# Altium PCB Amplifier2.PcbDoc
Units mm, origin at the board's own origin, x right, y up, seen from the top; angles counter-clockwise.
Board outline 80.64 x 88.01 mm, 2 copper layers (Top Layer, Bottom Layer); 44 components, 30 nets, 117 pads, 4 vias.
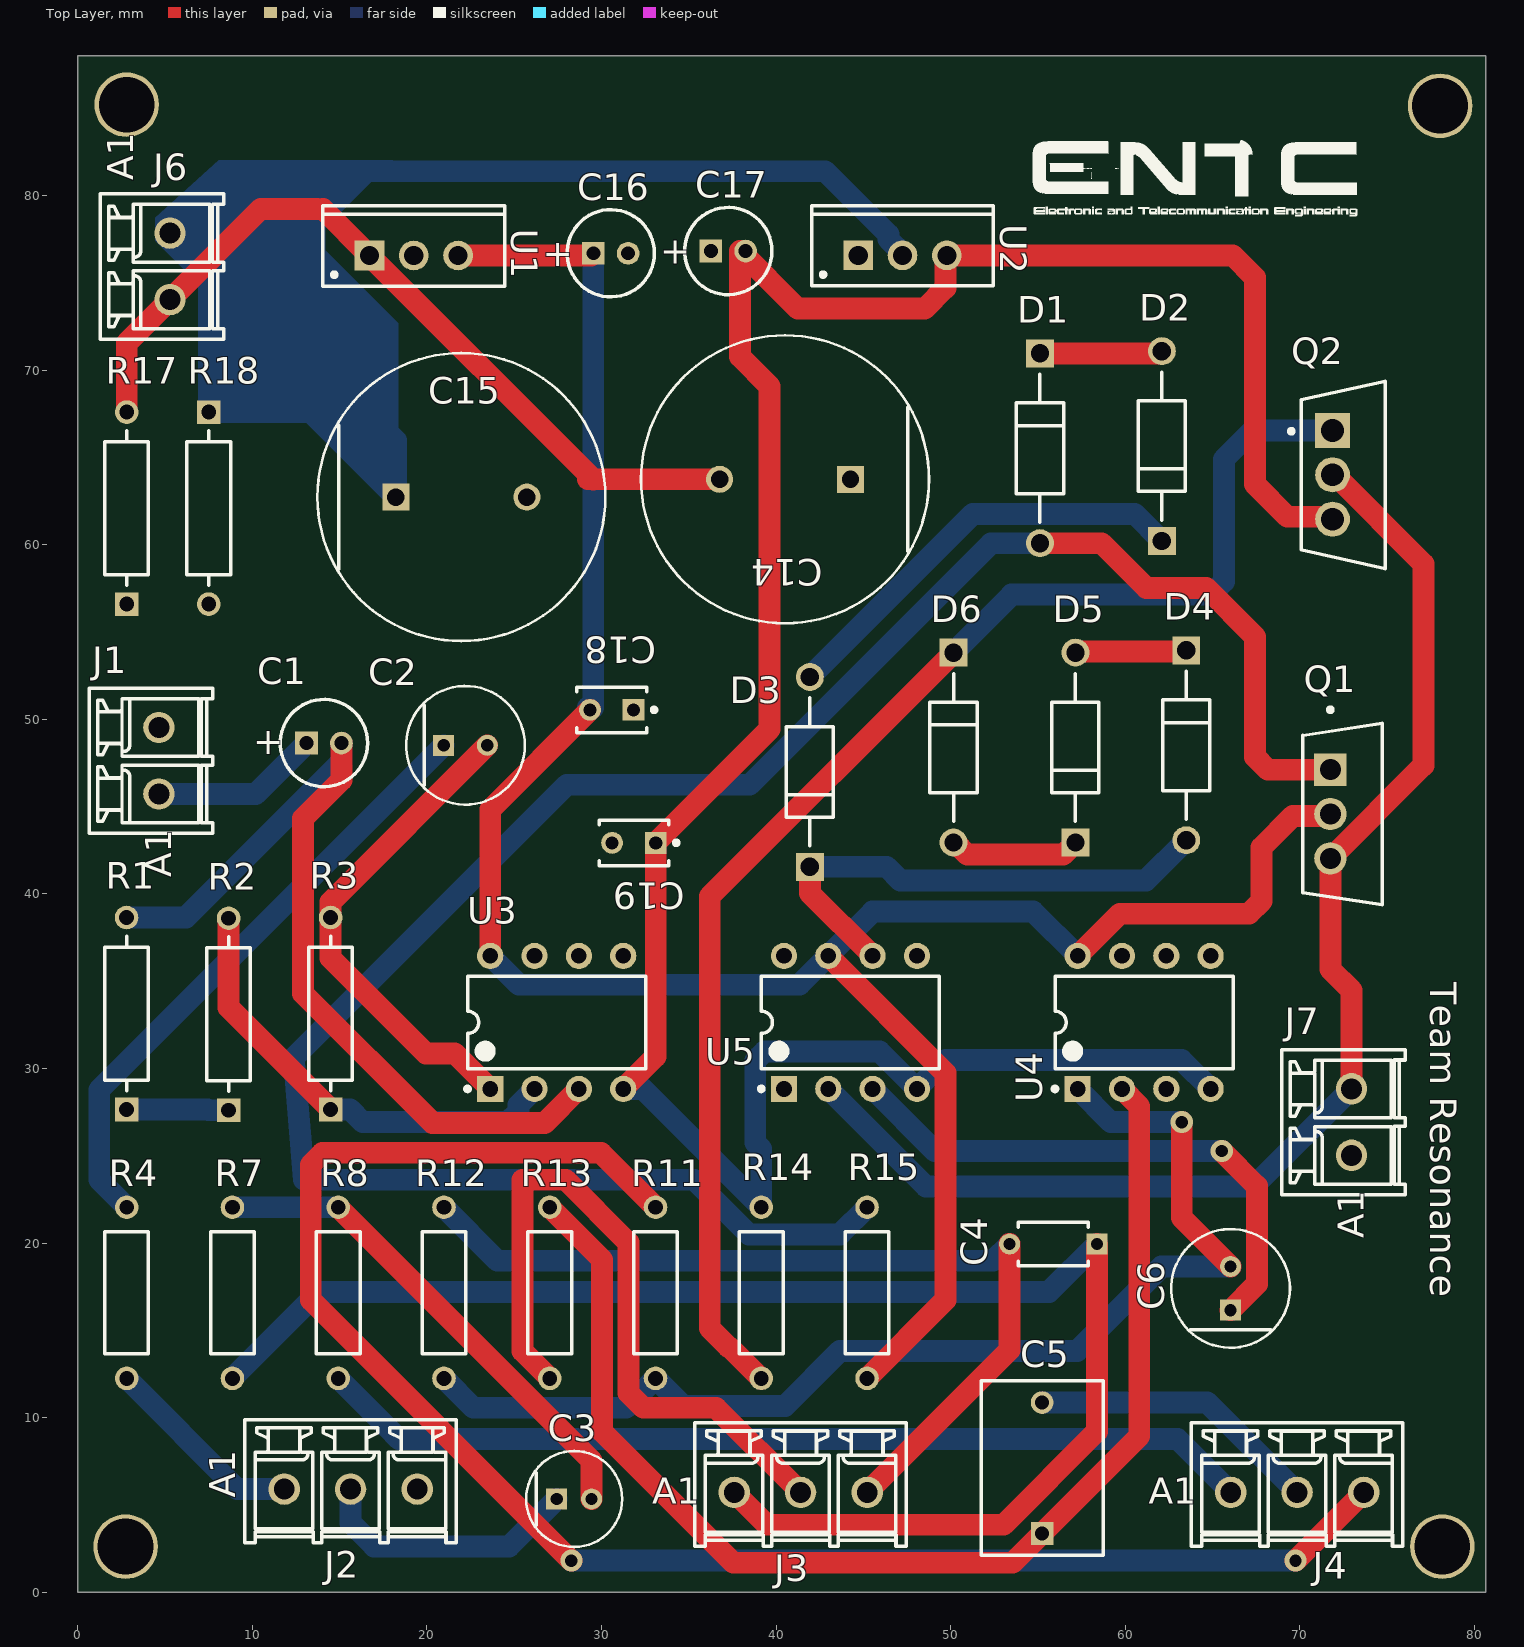
[diagram p0: Top Layer view]
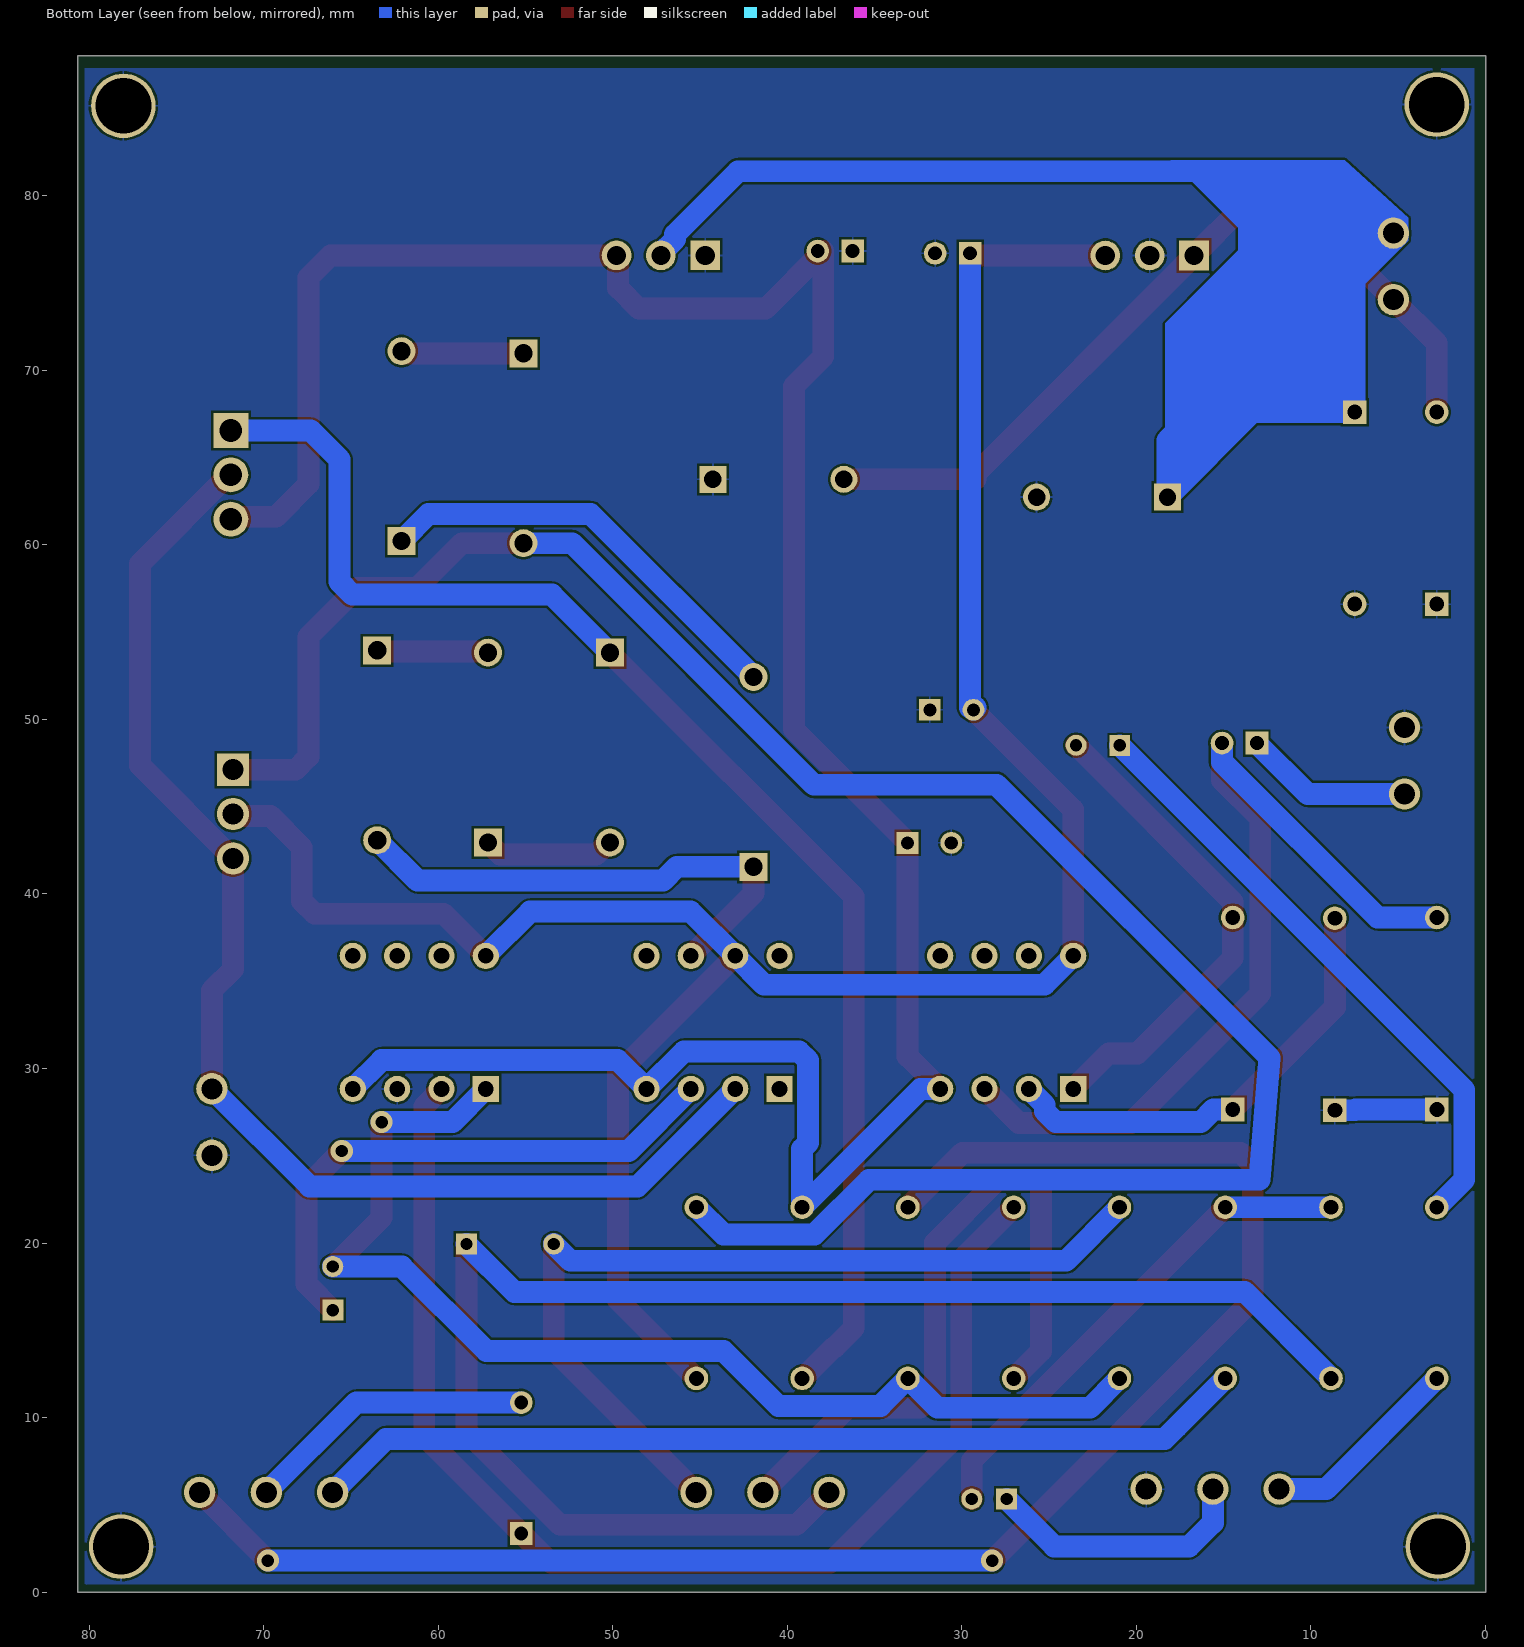
[diagram p1: Bottom Layer view, seen from below]
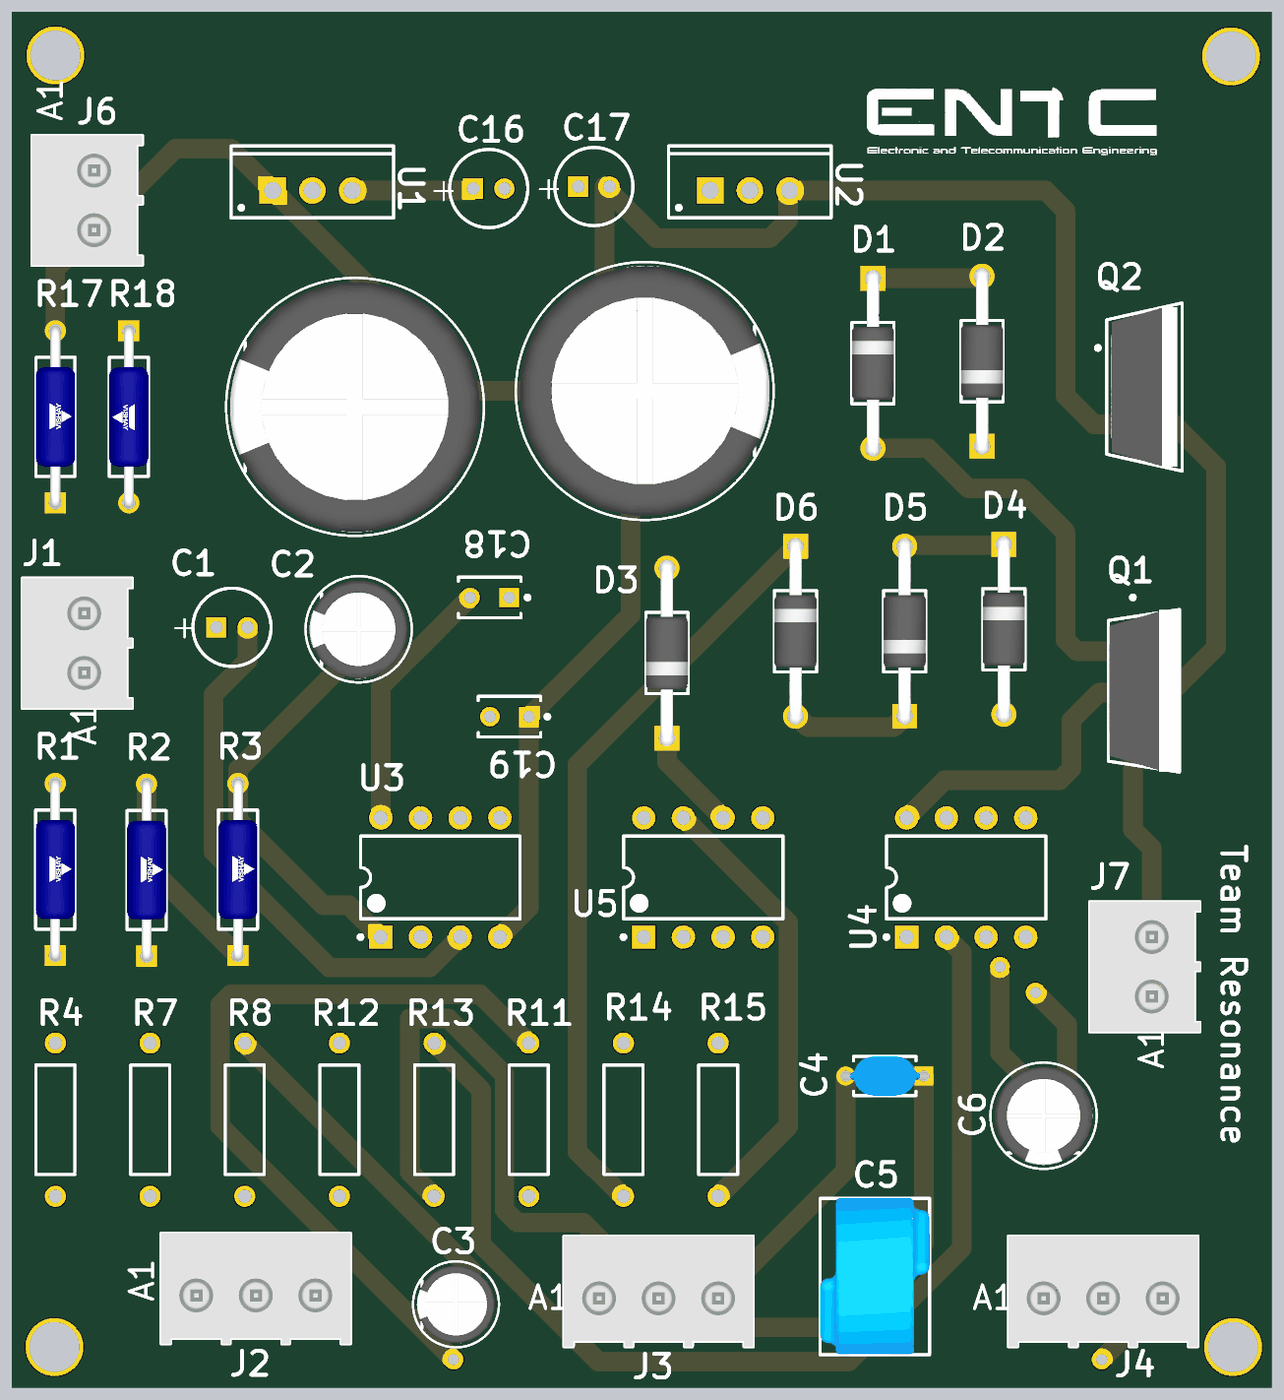
[diagram p2: 3D render of the assembled board from above, using the file's embedded part models]

## Layer stack, top to bottom
Top Solder: solder mask 0.0102, Solder Resist, Dk 3.5
Top Layer: signal copper 0.0356
Dielectric 1: dielectric 0.32, FR-4, Dk 4.8
Bottom Layer: signal copper 0.0356
Bottom Solder: solder mask 0.0102, Solder Resist, Dk 3.5

## Board outline
0,0 80.645,0 80.645,88.011 0,88.011

## Design rules (kind name [scope] priority, off if disabled: settings)
BoardOutlineClearance [All] p1: gap=0.2 ignorepadtopadclearanceinfootprint=FALSE
Clearance [All] p1: gap=0.127 ignorepadtopadclearanceinfootprint=FALSE except(0.25: Arc-Hole Track-Hole SMDPad-Hole THPad-Hole Via-Hole Fill-Hole Poly-Hole Region-Hole Text-Hole)
ComponentClearance [All] p1: gap=0.127 collisioncheckmode=3 verticalgap=0.127 showdistances=TRUE
DiffPairsRouting [All] p1: maxlimit=0.254 minlimit=0.127 mostfreqgap=0.127 toplayer_minwidth=0.127 toplayer_maxwidth=25.4 toplayer_prefwidth=0.127 bottomlayer_minwidth=0.127 bottomlayer_maxwidth=25.4 bottomlayer_prefwidth=0.127 maxuncoupledlength=12.7
Height [All] p1: minheight=0 maxheight=1816.048 prefheight=12.7
HoleSize [All] p1: absolutevalues=TRUE maxlimit=6.3 minlimit=0.3 maxpercent=80.000 minpercent=20.000
HoleToHoleClearance [All] p1: gap=0.25 allowstackedmicrovias=FALSE
MinimumAnnularRing [All] p1: minimumring=0.076
MinimumSolderMaskSliver [All] p1: minsoldermaskwidth=0
PlaneClearance [All] p1: clearance=0.127
PlaneConnect PlaneConnectPowerPads [InPadClass('PowerPads')] p1: planeconnectstyle=Direct reliefexpansion=0.508 reliefentries=4 reliefconductorwidth=0.254 reliefairgap=0.254
PlaneConnect [All] p2: pad.planeconnectstyle=Relief pad.reliefexpansion=0.3 pad.reliefentries=4 pad.reliefconductorwidth=0.127 pad.reliefairgap=0.127 via.planeconnectstyle=Direct via.reliefexpansion=0.3 via.reliefentries=4 via.reliefconductorwidth=0.127 via.reliefairgap=0.127
PolygonConnect PolygonConnectPowerPads [All vs (InPadClass('PowerPads'))] p1: connectstyle=Direct reliefconductorwidth=0.254 reliefentries=4 polygonreliefangle="90 Angle" airgapwidth=0.254
PolygonConnect [All] p2: thpad.connectstyle=Relief thpad.reliefconductorwidth=0.127 thpad.reliefentries=4 thpad.polygonreliefangle="90 Angle" thpad.airgapwidth=0.127 smdpad.connectstyle=Relief smdpad.reliefconductorwidth=0.127 smdpad.reliefentries=4 smdpad.polygonreliefangle="90 Angle" smdpad.airgapwidth=0.127 via.connectstyle=Direct via.reliefconductorwidth=0.127 via.reliefentries=4 via.polygonreliefangle="90 Angle" via.airgapwidth=0.127
RoutingVias [All] p1: holewidth=0.3 width=0.6 viastyle="Through Hole" minholewidth=0.3 minwidth=0.6 maxholewidth=0.6 maxwidth=6.6
SilkToSilkClearance [All] p1: silktosilkclearance=0
SilkToSolderMaskClearance [IsPad] p1: minsilkscreentomaskgap=0.127 clearancetoexposedcopper=TRUE
SolderMaskExpansion [All] p1: expansion=0.075 istentingtop=FALSE
Width [All] p1: maxlimit=25.4 minlimit=0.127 preferedwidth=0.127 minimp=50.000000 maximp=50.000000 favimp=50.000000
20 further rules are at their usual default settings.

## Classes and differential pairs
component class Amplifier: C1 C2 C3 C4 C5 C14 C16 C17 C18 C19 D1 D2 D3 D4 D5 D6 J1 J2 J3 J4 J6 Q1 Q2 R1 R2 R3 R4 R7 R8 R11 R12 R13 R14 R15 R17 R18 U1 U2 U3 U4 U5

## Components (designator, comment, footprint, x,y, rotation, side; value= is the part's Value field where it differs from the comment)
C1 "1uF" CAPPR55-200-1100X500X1200 14.097,48.641 r0 top
C2 "2.2uF" FP-RAD-TH-D_6_3_0_5-L_11-MFG 22.205,48.514 r0 top
C3 "0.47uF" FP-RAD-TH-D_5_0_5-L_11_1-MFG 28.432,5.334 r0 top
C4 "6.8nF" FP-RDE0M1-MFG 55.88,19.939 r180 top
C5 "3.3nF" FP-DE6_D10_T7_F7_5_d0_6-0-MFG 55.245,7.112 r90 top
C6 "2.2uF" FP-RAD-TH-D_6_3_0_5-L_11-MFG 66.04,17.399 r90 top
C14 "1000uF 50V" FP-RAD-TH-D_16_0_5-L_25_2-MFG 40.513,63.754 r180 top
C15 "1000uF 50V" FP-RAD-TH-D_16_0_5-L_25_2-MFG 21.971,62.738 r0 top
C16 "10uF 50V" CAPPR55-200-1100X500X1200 30.528,76.704 r0 top
C17 "10uF 50V" CAPPR55-200-1100X500X1200 37.259,76.831 r0 top
C18 "100nF 50V" VISH-K104K15X7RF5TL2 30.587,50.546 r180 top
C19 "100nF 50V" VISH-K104K15X7RF5TL2 31.857,42.926 r180 top
D1 "1N4007-E3/54" FP-1N4007-MFG 55.118,65.532 r270 top value=15pF
D2 "1N4007-E3/54" FP-1N4007-MFG 62.103,65.659 r90 top value=15pF
D3 "1N4007-E3/54" FP-1N4007-MFG 41.935,46.99 r90 top value=15pF
D4 "1N4007-E3/54" FP-1N4007-MFG 63.5,48.514 r270 top value=15pF
D5 "1N4007-E3/54" FP-1N4007-MFG 57.15,48.387 r90 top value=15pF
D6 "1N4007-E3/54" FP-1N4007-MFG 50.165,48.387 r270 top value=15pF
J1 "Mono Audio Jack" SC_SMT_3_81_180G_02 4.191,47.625 r90 top
J2 "100k Volume Control" SC_SMT_3_81_180G_03 15.621,6.35 r0 top
J3 "10k Bass Control" SC_SMT_3_81_180G_03 41.402,6.165 r0 top
J4 "100k Treble Control" SC_SMT_3_81_180G_03 69.85,6.165 r0 top
J6 "Power" SC_SMT_3_81_180G_02 4.826,75.946 r90 top
J7 "Speaker" SC_SMT_3_81_180G_02 72.517,26.924 r90 top
Q1 "IRFZ44VPBF" FP-PG-TO220-3-MFG#1 72.46,44.577 r0 top
Q2 "IRF4905PBF" FP-PG-TO220-3-MFG#2 72.492,64.008 r0 top
R1 "68k 0.25W" FP-RLR07-MFG 2.786,33.147 r90 top
R2 "1k 0.25W" FP-RLR07-MFG 8.632,33.108 r90 top
R3 "22k 0.25W" FP-RLR07-MFG 14.478,33.147 r90 top
R4 "10k 0.25W" OMTE-RES7X2.5-2 2.794,17.145 r90 top
R7 "10k 0.25W" OMTE-RES7X2.5-2 8.854,17.145 r90 top
R8 "4.7k 0.25W" OMTE-RES7X2.5-2 14.913,17.145 r90 top
R11 "4.7k 0.25W" OMTE-RES7X2.5-2 33.093,17.145 r90 top
R12 "10k 0.25W" OMTE-RES7X2.5-2 20.973,17.145 r90 top
R13 "10k 0.25W" OMTE-RES7X2.5-2 27.033,17.145 r90 top
R14 "10k 0.25W" OMTE-RES7X2.5-2 39.152,17.145 r90 top
R15 "10k 0.25W" OMTE-RES7X2.5-2 45.212,17.145 r90 top
R17 "68k 0.25W" FP-RLR07-MFG 2.794,62.103 r90 top
R18 "68k 0.25W" FP-RLR07-MFG 7.493,62.103 r270 top
U1 "L7815CV" TO220 19.241,76.577 r0 top
U2 "L7915CV" TO-220 47.244,76.581 r0 top
U3 "NE5532P" P0008A 27.432,32.639 r90 top
U4 "NE5532P" P0008A 61.087,32.639 r90 top
U5 "TL071CP" P0008A 44.259,32.639 r90 top

## Footprints (in the part's own frame and the unit in brackets; to place one, negate y for a bottom-side part, rotate by r counter-clockwise, add the part's x,y. Pads: shape width x height; smd on the part's side, far side on the other; paste and mask are expansions set on the pad)
CAPPR55-200-1100X500X1200 [mm] "THD, 2-Leads, Dia 5mm, Body Length 11mm"
  rect 1.3x1.3 hole 0.8: 1(-1,0)
  round 1.3 hole 0.8: 2(1,0)
  silkscreen extent -2.5,-2.5 2.5,2.5, body extent -2.5,-2.5 2.5,2.5, height 12
FP-1N4007-MFG [mm]
  rect 1.6x1.6 hole 1.05 paste-1000 mask+0: 1(-5.438,0)
  round 1.6 hole 1.05 paste-1000 mask+0: 2(5.438,0)
  silkscreen extent -4.24,-1.35 4.24,1.35, body extent -6.34,-1.45 6.34,1.45, height 0.25
FP-DE6_D10_T7_F7_5_d0_6-0-MFG [mm]
  rect 1.3x1.3 hole 0.8 paste-1000 mask+0: 1(-3.75,0)
  round 1.3 hole 0.8 paste-1000 mask+0: 2(3.75,0)
  silkscreen extent -5,-3.5 5,3.5, body extent -5.1,-3.6 5.1,3.6, height 0.25
FP-PG-TO220-3-MFG#1 [mm]
  rect 1.85x1.85 hole 1.2 paste-1000 mask+0: 1(-0.705,2.54)
  round 1.85 hole 1.2 paste-1000 mask+0: 2(-0.705,0) 3(-0.705,-2.54)
  silkscreen extent -2.27,-5.2 2.27,6.1, body extent -2.37,-5.55 2.37,5.55, height 0.25
FP-PG-TO220-3-MFG#2 [mm]
  rect 2x2 hole 1.3 paste-1000 mask+0: 1(-0.61,2.54)
  round 2 hole 1.3 paste-1000 mask+0: 2(-0.61,0) 3(-0.61,-2.54)
  silkscreen extent -3.1,-5.37 2.41,5.37, body extent -2.51,-5.48 2.51,5.48, height 0.25
FP-RAD-TH-D_5_0_5-L_11_1-MFG [mm]
  rect 1.2x1.2 hole 0.7 paste-1000 mask+0: 1(-1,0)
  round 1.2 hole 0.7 paste-1000 mask+0: 2(1,0)
  silkscreen extent -2.75,-2.75 2.75,2.75, body extent -2.85,-2.85 2.85,2.85, height 0.25
FP-RAD-TH-D_6_3_0_5-L_11-MFG [mm]
  rect 1.2x1.2 hole 0.7 paste-1000 mask+0: 1(-1.25,0)
  round 1.2 hole 0.7 paste-1000 mask+0: 2(1.25,0)
  silkscreen extent -3.4,-3.4 3.4,3.4, body extent -3.5,-3.5 3.5,3.5, height 0.25
FP-RAD-TH-D_16_0_5-L_25_2-MFG [mm]
  rect 1.55x1.55 hole 1 paste-1000 mask+0: 1(-3.75,0)
  round 1.55 hole 1 paste-1000 mask+0: 2(3.75,0)
  silkscreen extent -8.25,-8.25 8.25,8.25, body extent -8.35,-8.35 8.35,8.35, height 0.25
FP-RDE0M1-MFG [mm]
  rect 1.2x1.2 hole 0.7 paste-1000 mask+0: 1(-2.5,0)
  round 1.2 hole 0.7 paste-1000 mask+0: 2(2.5,0)
  silkscreen extent -2,-1.25 2,1.25, body extent -3.2,-1.35 3.2,1.35, height 0.25
FP-RLR07-MFG [mm]
  rect 1.35x1.35 hole 0.85 paste-1000 mask+0: 1(-5.5,0)
  round 1.35 hole 0.85 paste-1000 mask+0: 2(5.5,0)
  silkscreen extent -4.42,-1.25 4.42,1.25, body extent -6.27,-1.35 6.27,1.35, height 0.25
OMTE-RES7X2.5-2 [mm] "Resistor, Axial; Body 7x2.5mm, Lead Dia. 0.6mm"
  round 1.35 hole 0.85: 1(-4.9,0) 2(4.9,0)
  silkscreen extent -3.5,-1.25 3.5,1.25, body extent -3.5,-1.25 3.5,1.25, height 2.5
P0008A [mm] "DIP, 8-Leads, Body 10.15x6.6mm, Pitch 2.54mm"
  rect 1.5x1.5 hole 0.9: 1(-3.81,3.81)
  round 1.5 hole 0.9: 2(-3.81,1.27) 3(-3.81,-1.27) 4(-3.81,-3.81) 5(3.81,-3.81) 6(3.81,-1.27) 7(3.81,1.27) 8(3.81,3.81)
  silkscreen extent -3.93,-5.1 2.65,5.23, body extent -3.95,-5.07 3.95,5.07, height 5.08
SC_SMT_3_81_180G_02 [mm] "OMNIMATE Signal - Serie BC/SC 3.81  SC-SMT 3.81/02/180G 3.2"
  round 1.8 hole 1.2: A1(-1.9,-0.45) A2(1.91,-0.45)
  silkscreen extent -4.16,-3.54 4.15,3.54, body extent -4.15,-3.53 4.15,3.53, height 9.21
SC_SMT_3_81_180G_03 [mm] "OMNIMATE Signal - Serie BC/SC 3.81  SC-SMT 3.81/03/180G 3.2"
  round 1.8 hole 1.2: A1(-3.8,-0.45) A2(0,-0.45) A3(3.82,-0.45)
  silkscreen extent -6.06,-3.54 6.06,3.54, body extent -6.06,-3.53 6.06,3.53, height 9.21
TO220 [mm] "TO, Thru-Hole, Vertical, Heatsink Mounted; 3 In-Line Leads; Pitch 2.54 mm"
  rect 1.7x1.7 hole 1.1: 1(-2.54,0)
  round 1.7 hole 1.1: 2(0,0) 3(2.54,0)
  silkscreen extent -5.2,-1.75 5.2,2.85, body extent -5.25,-1.8 5.25,2.9, height 19.7
TO-220 [mm] "TO, Thru-Hole, Vertical, Heatsink Mounted; 3 In-Line Leads; Pitch 2.54 mm"
  rect 1.7x1.7 hole 1.1: 1(-2.54,0)
  round 1.7 hole 1.1: 2(0,0) 3(2.54,0)
  silkscreen extent -5.2,-1.75 5.2,2.85, body extent -5.25,-1.8 5.25,2.9, height 19.7
VISH-K104K15X7RF5TL2 [mm] "THD, 2-Leads, Body 4x2.6mm"
  rect 1.25x1.25 hole 0.75: 1(-1.25,0)
  round 1.25 hole 0.75: 2(1.25,0)
  silkscreen extent -2.55,-1.3 2,1.3, body extent -2,-1.3 2,1.3, height 5.6

## Part data
C1: library part CMP-1665-00039-1, "Aluminum Electrolytic Capacitor, 1 uF, +/- 20%, 50 V, -55 to 105 degC, 2-Pin THD, RoHS, Bulk", Max Operating Temperature="70 degC", Min Operating Temperature="-30 degC", Package Quantity=150, Channels=2, ComponentLink1Description="Manufacturer URL", ComponentLink1URL=http://www.panasonic.com/, ComponentLink2Description=Datasheet, ComponentLink2URL=https://datasheet.ciiva.com/7275/94060-7275472.pdf, DatasheetVersion=Mar-05, Mount="Through Hole", PackageDescription="2-Pin Radial Lead, Dia 5 mm, Body Length 11 mm", PackageReference=CAPPR55-200-1100X500X1200, Packaging=Bulk, Radiation Hardening=No, RoHSCompliant=true
C2 C6: library part CMP-05427-001349-1, "Aluminum Electrolytic Capacitors (Radial Lead Type) 2.2uF ±20% 160V", Case/Package=Radial, Dielectric Material=Aluminium, Max Operating Temperature=105°C, Min Operating Temperature=-25°C, Package Quantity=200, Ripple Current=25mA, Tolerance=20%, Voltage=160V, Capacitance=2.2uF, Construction=RADIAL, Contact Plating=Tin, Diameter=6.3mm, Dissipation Factor=0.15%, Height=11.2mm, Height - Seated (Max)=0.48inch, Lead Diameter=0.5mm, Lead Free="Lead Free", Lead Pitch=2.5mm, Lead/Base Style=Straight, Length=11.2mm, Life (Hours)=2000Hour, Mount="Through Hole", Number of Pins=2, Packaging=Bulk, Radiation Hardening=No, REACH SVHC="No SVHC", Ripple Current (AC)=25mA, RoHS Compliant=Yes, Series=NHG, Termination=Radial, Voltage Rating=160V, Voltage Rating (DC)=160V
C3: library part CMP-05427-001047-1, "Aluminum Electrolytic Capacitors (Radial Lead Type) 0.47uF ±20% 63V", Capacitance=470nF, Case/Package=Radial, Leakage Current=3uA, Max Operating Temperature=105°C, Min Operating Temperature=-40°C, Package Quantity=200, Ripple Current=4.5mA, Tolerance=20%, Voltage=63V, Construction=RADIAL, Diameter=5mm, Height=11mm, Height - Seated (Max)=0.433inch, Lead Diameter=0.5mm, Lead Free="Lead Free", Lead Pitch=2mm, Length=11mm, Life (Hours)=5000Hour, Mount="Through Hole", Number of Pins=2, Packaging=Bulk, Polarity=Polar, Radiation Hardening=No, REACH SVHC="No SVHC", Ripple Current (AC)=4.5mA, RoHS Compliant=Yes, Series=EB, Termination=Radial, Voltage Rating=63V, Voltage Rating (DC)=63V
C4: library part CMP-06035-012055-1, "Ceramic Capacitor 6.8nF ±10% 100V X7R Radial", Case/Package=Radial, Dielectric=X7R, Max Operating Temperature=125°C, Min Operating Temperature=-55°C, Package Quantity=2000, Resistor Type=Ceramic, Tolerance=10%, Voltage Rating=100V, Capacitance=6.8nF, Height=3.5mm, Height - Seated (Max)=0.236inch, Lead Diameter=0.5mm, Lead Free="Lead Free", Lead Pitch=0.197inch, Lead/Base Style=Kinked, Length=0.157inch, Mount="Through Hole", Packaging="Tape and Reel", Termination=Radial, Voltage Rating (DC)=100V, Width=0.098inch
C5: library part CMP-06035-062531-1, "CAP CER 3300PF 300VAC RADIAL", Case/Package=Radial, Max Operating Temperature=125°C, Min Operating Temperature=-25°C, Package Quantity=700, Ratings=AEC-Q200, Resistor Type=Ceramic, Tolerance=20%, Voltage Rating (AC)=300V, Capacitance=3.3nF, Depth=7mm, Height - Seated (Max)=0.512inch, Lead Diameter=0.6mm, Lead Pitch=7.5mm, Lead/Base Style="Formed Leads", Mount="Through Hole", Packaging="Cut Tape", REACH SVHC="No SVHC", Series=KJ, Termination=Radial, Width=7mm
C14 C15: library part CMP-05427-000487-1, "Aluminum Electrolytic Capacitors (Radial Lead Type) 1000uF ±20% 50V", Capacitance=1mF, Case/Package=Radial, ESR (Equivalent Series Resistance)=16mR, Max Operating Temperature=105°C, Min Operating Temperature=-40°C, Package Quantity=250, Ripple Current=3.32A, Tolerance=20%, Voltage Rating=50V, Contact Plating=Tin, Diameter=16mm, Features="General Purpose", Height=25mm, Height - Seated (Max)=0.984inch, Impedance=16mR, Lead Diameter=0.8mm, Lead Free="Lead Free", Lead Pitch=7.5mm, Length=25mm, Life (Hours)=10000Hour, Mount="Through Hole", Number of Pins=2, Packaging="Tape and Reel", Polarity=Polar, Radiation Hardening=No, REACH SVHC="No SVHC", RoHS Compliant=Yes, Series=FR, Termination="Through Hole", Voltage Rating (DC)=50V
C16 C17: library part CMP-1665-00038-2, "Aluminum Electrolytic Capacitor, 10 uF, +/- 20%, 50 V, -40 to 85 degC, 2-Pin THD, RoHS, Bulk", Capacitance=10uF, Case/Package=Radial, Dielectric Material=Aluminium, Leakage Current=3uA, Manufacturer=Panasonic, Max Operating Temperature=85degC, Min Operating Temperature=-40degC, Package Description="2-Pin Radial Lead, Dia 5 mm, Height 12 mm", Package Quantity=200, Package Reference=CAPPR55-200-1100X500X1200, Ripple Current=65mA, Tolerance=20%, Voltage=50V, Datasheet URL=https://industrial.panasonic.com/cdbs/www-data/pdf/RDF0000/ABA0000C1218.pdf, Datasheet Version="Rev. 05, 10/2016", Diameter=5mm, Dissipation Factor=0.12%, Height=11mm, Height - Seated (Max)=0.472inch, Lead Diameter=0.5mm, Lead Free=LeadFree, Lead Pitch=2mm, Lead/Base Style=Straight, Length=11mm, Life (Hours)=2000Hour, Manufacturer URL=http://www.panasonic.com/, Mount=ThroughHole, Number of Pins=2, Packaging=Bulk, Radiation Hardening=No, REACH SVHC=NoSVHC, Ripple Current (AC)=65mA, RoHSCompliant=true, Termination=Radial, Voltage Rating=50V, Voltage Rating (DC)=50V
C18 C19: library part CMP-2000-06508-1, "Ceramic Capacitor, 100 nF, +/- 10%, 50 V, -55 to 125 degC, 2-Pin THD, RoHS, Tape and Reel", Capacitance=0.1µF, Manufacturer=Vishay, Operating Temperature=-55°C~125°C, Package / Case=Radial, Package Description="2-Pin Through Hole Device, Body 4 x 2.6 mm", Package Reference=K104K15X7RF5TL2, Ratings=-, Standard Package=1, Temperature Coefficient=X7R, Tolerance=±10%, Voltage - Rated=50V, Applications=GeneralPurpose, Catalog Drawings=Mono-KapSide2-15_5.58Mono-KapSide1_15, Category=Capacitors, Datasheet URL=http://www.vishay.com/docs/45171/kseries.pdf, Datasheet Version=08/2013, Family=CeramicCapacitors, Features=-, Height - Seated (Max)="0.220\"(5.58mm)", Lead Spacing="0.098\"(2.50mm)", Lead Style=Straight, Manufacturer URL=http://www.vishay.com/, Mounting Technology=ThroughHole, Mounting Type=ThroughHole, Online Catalog=Mono-Kap™Series, Other Names=BC1084CT, Packaging=CutTape(CT), Series=Mono-Kap™K, Size / Dimension="0.157\"Lx0.098\"W(4.00mmx2.50mm)", Thickness (Max)=-
D1 D2 D3 D4 D5 D6: library part CMP-02540-000046-1, "DIODE GEN PURP 1KV 1A DO204AL", Capacitance=15pF, Forward Current=1A, Manufacturer=Vishay, Max Junction Temp=+150°C, Max Repetitive Reverse Voltage=1000V, Max Surge Forward Current=30A, Package=1N4007, Peak Reverse Current=30uA, Temperature="-50°C to +150°C", Temperature Range Low=-50°C, Automotive=No, Category=Diode, ComponentLink2Description=Datasheet, ComponentLink2URL=http://www.vishay.com/docs/88503/1n4001.pdf, Device Class L1="Discrete Semiconductors", Device Class L2=Diodes, Device Class L3="Rectifier Diodes", Digikey Description="DIODE GEN PURP 1KV 1A DO204AL", Height=2.7mm, Ipc Land Pattern Name=DIOPA1088W105L520D270, Lead Free=Yes, Manufacturer Part Number=1N4007-E3/54, Mouser Description="Rectifiers Vr/1000V Io/1A", Octopart=https://octopart.com/1n4007-e3%2F54-vishay-39548207, RoHS=TRUE, Temperature Range High=+150°C
J1 J6 J7: library part CMP-1559-00412-1, "OMNIMATE Signal - series BC/SC 3.81", Colour=Black, Manufacturer=Weidmueller, PartNumber=1863720000, Rated_current_min_no_of_poles_TU_20_deg_C="17.5 A", Rated_current_use_group_B_UL_1059="10 A", Rated_voltage_for_surge_voltage_class_pollution_degree_II_2="320 V", Rated_voltage_use_group_B_UL_1059="300 V", UL_94_flammability_rating=V-0, ComponentLink1Description="Manufacturer URL", ComponentLink1URL=http://www.weidmueller.com/, ComponentLink2Description="URL Link1", ComponentLink2URL=http://catalog.weidmueller.com/catalog/Start.do?localeId=en&ObjectID=1863720000, Contact_surface=tinned, Insulating_material="LCP GF", Mounting_onto_the_PCB="Reflow solder connection", No_of_poles=2, Outgoing_elbow=180°, PackageReference=SC_SMT_3_81_180G_02, Packaging=Box, Pitch_inch="0.15 inch", Pitch_mm="3.81 mm", Qty="50 PCS", Revision=V1, Short_text_for_material="SC-SMT 3.81/02/180G 1.5SN BK BX", Side_termination_characteristic="closed side", Solder_pin_length_mm="1.5 mm"
J2 J3 J4: library part CMP-1559-00420-1, "OMNIMATE Signal - series BC/SC 3.81", Colour=Black, Manufacturer=Weidmueller, PartNumber=1862940000, Rated_current_min_no_of_poles_TU_20_deg_C="19 A", Rated_current_use_group_B_UL_1059="10 A", Rated_voltage_for_surge_voltage_class_pollution_degree_II_2="320 V", Rated_voltage_use_group_B_UL_1059="300 V", UL_94_flammability_rating=V-0, ComponentLink1Description="Manufacturer URL", ComponentLink1URL=http://www.weidmueller.com/, ComponentLink2Description="URL Link1", ComponentLink2URL=http://catalog.weidmueller.com/catalog/Start.do?localeId=en&ObjectID=1862940000, Contact_material=Cu-Leg, Contact_surface=tinned, Insulating_material="LCP GF", Mounting_onto_the_PCB="Reflow solder connection", No_of_poles=3, Outgoing_elbow=180°, PackageReference=SC_SMT_3_81_180G_03, Packaging=Box, Pitch_inch="0.15 inch", Pitch_mm="3.81 mm", Qty="50 PCS", Revision=V1, Short_text_for_material="SC-SMT 3.81/03/180G 3.2SN BK BX", Side_termination_characteristic="closed side", Solder_pin_length_mm="3.2 mm"
Q1: library part CMP-32901-001154-1, "MOSFET N-CH 60V 55A TO220AB", Case/Package=TO-220, Continuous Drain Current (ID)=55A, Drain to Source Breakdown Voltage=60V, Drain to Source Resistance=16.5mR, Gate to Source Voltage (Vgs)=20V, Input Capacitance=1.812nF, Max Operating Temperature=175°C, Max Power Dissipation=115W, Min Operating Temperature=-55°C, Threshold Voltage=4V, Drain to Source Voltage (Vdss)=60V, Element Configuration=Single, Halogen Free="Halogen Free", Height=0.65inch, Lead Free="Lead Free", Length=0.42inch, Max Dual Supply Voltage=60V, Mount="Through Hole", Number of Pins=3, Packaging=Rail/Tube, Polarization=N, Power Dissipation=115W, Rds On Max=16.5mR, Reach SVHC Compliant=Yes, RoHS Compliant=Yes, Series=HEXFET®, Turn-Off Delay Time=40ns, Turn-On Delay Time=13ns, Width=0.19inch
Q2: library part CMP-32901-000200-1, "MOSFET P-CH 55V 74A TO-220AB", Case/Package=TO-220, Continuous Drain Current (ID)=74A, Drain to Source Breakdown Voltage=-55V, Drain to Source Resistance=20mR, Gate to Source Voltage (Vgs)=20V, Input Capacitance=3.4nF, Max Operating Temperature=175°C, Max Power Dissipation=200W, Min Operating Temperature=-55°C, Threshold Voltage=-4V, Drain to Source Voltage (Vdss)=-55V, Element Configuration=Single, Halogen Free="Halogen Free", Height=0.6inch, Lead Free="Lead Free", Length=0.414inch, Max Dual Supply Voltage=-55V, Mount="Through Hole", Number of Pins=3, Packaging=Rail/Tube, Power Dissipation=200W, Rds On Max=20mR, REACH SVHC="No SVHC", RoHS Compliant=Yes, Turn-Off Delay Time=61ns, Turn-On Delay Time=18ns, Width=0.185inch
R1 R2 R3 R17 R18: library part CMP-00030-42769933-1, "RLR07C15R0FSB14 Res Metal Film 15 Ohm 1% 1/4W ±100ppm/°C 0.001% Conformal AXL Thru-Hole Bulk", Case/Package=Conformal, Max Operating Temperature=150°C, Max Power Dissipation=250mW, Min Operating Temperature=-65°C, Resistance=15Ω, Temperature Coefficient=100ppm/°C, Tolerance=1%, Composition="Metal Film", Contact Plating="Lead, Tin", Diameter=2.29mm, Failure Rate=0.001%, Features="Military, Moisture Resistant, Weldable", Lead Free="Contains Lead", Length=7.62mm, Military Standard=MIL-PRF-39017, Mount="Through Hole", NexarPartId=42769933, Number of Terminations=2, Packaging=Bulk, Power Rating=250mW, RoHS=Compliant, Schedule B=8533210090, Termination=Axial, Width=2.29mm
R4 R7 R8 R11 R12 R13 R14 R15: library part CMP-2000-06865-1, "Little Demon(R) Carbon Composition Molded OD Series, 250 V, 10 KOhm, +/-5%, -70 to 130 degC, 2-Pin THD, RoHS, Bulk", Manufacturer=Ohmite, Operating Temperature=-, Package / Case=Axial, Package Description="2-Pin THD Resistor, Body 7 x 2.5 mm, Lead Dia. 0.6 mm", Package Reference=RES7X2.5, PartNumber=OD103JE, Power (Watts)=0.25W,1/4W, Power Rating=0.25W, Resistance (Ohms)=10k, Standard Package=100, Tolerance=±5%, Catalog Drawings=OD,OF,OASeries, Category=Resistors, Composition=CarbonComposition, Datasheet URL=http://www.ohmite.com/cat/res_od_of_oa.pdf, Datasheet Version=06/2016, EDA / CAD Models=DownloadfromAcceleratedDesigns, Family=ThroughHoleResistors, Features=PulseWithstanding, Height=-, Manufacturer URL=http://www.ohmite.com/, Mounting Technology=ThroughHole, Number of Terminations=2, Online Catalog=OD,OF,OASeries,LittleDemon®, Packaging=Bulk, RoHS Information="LittleDemon\"E\"SeriesMaterialDeclaration", Series=LittleDemon®OD, Size / Dimension="0.098\"Diax0.276\"L(2.50mmx7.00mm)", Supplier Device Package=Axial, Temperature Coefficient=-
U1: library part CMP-0244-00422-1, "Positive Voltage Regulator, 15V, 3-Pin TO-220", ComponentLink1Description="Manufacturer URL", ComponentLink1URL=http://www.st.com, ComponentLink2Description=Datasheet, ComponentLink2URL=http://www.st.com/internet/com/TECHNICAL_RESOURCES/TECHNICAL_LITERATURE/DATASHEET/CD00000444.pdf, ComponentLink3Description="Package Specification", ComponentLink3URL=http://www.st.com/internet/com/TECHNICAL_RESOURCES/TECHNICAL_LITERATURE/PACKAGE_INFORMATION/CD00004649.pdf, DatasheetVersion=16/11/2011, PackageDescription="TO, Thru-Hole, Vertical, Heatsink Mounted; 3 In-Line Leads; Pitch 2.54 mm", PackageReference=TO220, PackageVersion=ver3.0
U2: library part CMP-0244-00473-1, "Negative Voltage Regulator, -15V, 3-Pin D2PAK", ComponentLink1Description="Manufacturer URL", ComponentLink1URL=http://www.st.com, ComponentLink2Description=Datasheet, ComponentLink2URL=http://www.st.com/internet/com/TECHNICAL_RESOURCES/TECHNICAL_LITERATURE/DATASHEET/CD00000450.pdf, DatasheetVersion=1/11/2011, PackageDescription="TO, Thru-Hole, Vertical, Heatsink Mounted; 3 In-Line Leads; Pitch 2.54 mm", PackageReference=TO-220, PackageVersion=2011
U3 U4: library part CMP-0017-00910-2, "Dual Low-Noise High-Speed Audio Operational Amplifier, 10 to 30 V, 0 to 70 degC, 8-pin DIP (P8), Pb-Free (RoHS)", Manufacturer="Texas Instruments", Total Supply Voltage(Max)(+5V is 5, +/-5V is 10)=30, Total Supply Voltage(Min)(+5V is 5, +/-5V is 10)=10, CMRR(Min)(dB)=70, Code_JEDEC=MS-001, ComponentLink1Description="Manufacturer URL", ComponentLink1URL=http://www.ti.com/, ComponentLink2Description=Datasheet, ComponentLink2URL=http://www.ti.com/lit/ds/symlink/ne5532.pdf, ComponentLink3Description="Package Specification", ComponentLink3URL=http://www.ti.com/litv/pdf/mpdi001b, DatasheetVersion=SLOS075I, Eco-Plan="Pb-Free (RoHS)", GBW(Typ)(MHz)=10, IIB(Max)(pA)=800000, Iq per channel(Max)(mA)=4, Mounting Technology="Through Hole", Number of Channels=2, PackageDescription="8-Pin Plastic In-Line, Body 9.59 x 6.35 mm, Pitch 2.54 mm", PackageReference=P0008A, PackageVersion="4040082/E, 04/2010", PartNumber=NE5532P, Slew Rate(Typ)(V/us)=9, Sub Family="General Purpose Amplifier, High Supply Voltage Amplifier (>=30V), Low Noise Amp (<=10nV/rtHz)", Vio (25C)(Max)(mV)=4, Vn at 1kHz(Typ)(nV/rtHz)=5
U5: library part CMP-0017-00972-2, "Low-Noise JFET-Input General-Purpose Operational Amplifier, 7 to 36 V, 0 to 70 degC, 8-pin DIP (P8), Pb-Free (RoHS)", Manufacturer="Texas Instruments", Rating=Military, Total Supply Voltage(Max)(+5V is 5, +/-5V is 10)=36, Total Supply Voltage(Min)(+5V is 5, +/-5V is 10)=7, CMRR(Min)(dB)=70, Code_JEDEC=MS-001, ComponentLink1Description="Manufacturer URL", ComponentLink1URL=http://www.ti.com/, ComponentLink2Description=Datasheet, ComponentLink2URL=http://www.ti.com/lit/ds/symlink/tl071.pdf, ComponentLink3Description="Package Specification", ComponentLink3URL=http://www.ti.com/litv/pdf/mpdi001b, DatasheetVersion=SLOS080J, Eco-Plan="Pb-Free (RoHS)", GBW(Typ)(MHz)=3, IIB(Max)(pA)=200, Iq per channel(Max)(mA)=2.5, Mounting Technology="Through Hole", Number of Channels=1, Offset Drift(Typ)(uV/C)=18, PackageDescription="8-Pin Plastic In-Line, Body 9.59 x 6.35 mm, Pitch 2.54 mm", PackageReference=P0008A, PackageVersion="4040082/E, 04/2010", PartNumber=TL071CP, Slew Rate(Typ)(V/us)=13, Sub Family="General Purpose Amplifier, High Supply Voltage Amplifier (>=30V)", Vio (25C)(Max)(mV)=10, Vn at 1kHz(Typ)(nV/rtHz)=18

## Free pads (board coordinates)
  round 3.7 hole 3.2: 1(78.041,85.153) 2(2.794,85.217) 3(2.73,2.603) 4(78.168,2.603)

## Via types
v1: diameter 1.27, hole 0.711, Top Layer to Bottom Layer, 4 vias

## Nets (pads, with @x,y where several pads share a name; then routed paths per layer and width w, separated by ;. In a path a pad name is that pad's centre, name@x,y a point inside that pad or via, vN(x,y) a via of type N, cw(c..) or ccw(c..) an arc to the next point about the centre after c; other vN are vias at no path point)
+15: C16.1 C18.2 Q1.2 R15.1 U1.3 U3.8 U4.8 U5.7 | length 136.1
  Top Layer w1.25: U1.3 29.401,76.577 C16.1 ; U3.8 23.622,44.831 C18.2 ; U5.7 49.708,29.731 49.708,16.741 R15.1 ; U4.8 59.69,38.862 67.086,38.862 67.818,39.594 67.818,42.672 69.608,44.462 71.64,44.462 Q1.2
  Bottom Layer w1.25: U3.8 25.273,34.798 41.338,34.798 U5.7 45.529,38.989 54.737,38.989 U4.8 ; C18.2@29.21,50.673 C18.2 ; C18.2@29.528,50.669 C16.1
-15: C17.2 C19.1 Q2.3 R14.2 U2.3 U3.4 U4.4 U5.4 | length 150.8
  Top Layer w1.25: U3.4 33.107,30.694 C19.1 39.624,49.443 39.624,69.088 37.941,70.771 37.941,76.835 41.243,73.533 48.514,73.533 49.698,74.717 49.698,76.495 U2.3 66.167,76.581 67.437,75.311 67.437,63.47 69.296,61.612 71.738,61.612 Q2.3
  Bottom Layer w1.25: U3.4 32.368,28.829 R14.2 39.152,25.4 38.811,25.741 38.811,30.455 39.319,30.963 45.936,30.963 U5.4 49.721,30.48 63.246,30.48 U4.4
GND: C14.1 C15.2 C16.2 C17.1 C18.1 C19.2 J1.A2 J2.A3 J7.A1 pad.1 pad.2 pad.3 pad.4 R1.1 R2.1 R17.1 R18.2 U1.2 U2.1 U4.3 | length 5.9
  Bottom Layer w1.25: R1.1 7.44,27.647 7.479,27.608 R2.1
NetC1_1: C1.1 J1.A1 | length 9.7
  Bottom Layer w1.25: J1.A1 10.181,45.725 C1.1
NetC1_2: C1.2 R1.2 U3.3 | length 52
  Top Layer w1.25: C1.2 15.097,46.517 12.903,44.323 12.903,34.29 20.32,26.873 26.746,26.873 U3.3
  Bottom Layer w1.25: R1.2 6.186,38.647 15.097,47.558 C1.2
NetC2_2: C2.2 R3.2 U3.1 | length 28.2
  Top Layer w1.25: C2.2 14.478,39.537 R3.2 14.478,36.322 19.939,30.861 21.59,30.861 U3.1
NetC3_1: C3.1 J2.A2 | length 15.4
  Bottom Layer w1.25: J2.A2 15.621,3.966 16.97,2.617 24.715,2.617 C3.1
NetC3_2: C3.2 R7.2 R8.2 | length 28.8
  Top Layer w1.25: R8.2 29.432,7.526 C3.2
  Bottom Layer w1.25: R7.2 R8.2
NetC4_1: C4.1 J3.A1 R7.1 | length 87.2
  Top Layer w1.25: J3.A1 39.456,3.861 53.035,3.861 58.38,9.206 C4.1
  Bottom Layer w1.25: R7.1 13.805,17.196 55.637,17.196 C4.1
NetC4_2: C4.2 J3.A3 R12.2 | length 51.7
  Top Layer w1.25: J3.A3 53.38,13.873 C4.2
  Bottom Layer w1.25: R12.2 24.031,18.987 52.428,18.987 C4.2
NetC5_1: C5.1 R13.2 U4.2 | length 71.3
  Top Layer w1.25: R13.2 30.035,19.043 30.035,9.187 37.545,1.676 53.559,1.676 C5.1 60.808,8.925 60.808,27.838 U4.2
NetC5_2: C5.2 J4.A2 | length 16.7
  Bottom Layer w1.25: C5.2 64.703,10.862 J4.A2
NetC6_2: C6.2 R11.1 R12.1 U4.1 | length 66.6
  Top Layer w1.25: v1(63.246,26.924) 63.246,21.443 C6.2
  Bottom Layer w1.25: R12.1 22.652,10.566 31.414,10.566 R11.1 34.67,10.668 40.513,10.668 43.663,13.818 57.252,13.818 62.083,18.649 C6.2 ; U4.1 59.182,26.924 v1(63.246,26.924)
NetC14_2: C14.2 J6.A1 R17.2 U1.1 | length 47.5
  Top Layer w1.25: R17.2 2.794,71.564 J6.A1 10.478,79.248 13.716,79.248 ; 14.034,79.244 U1.1 29.528,63.75 ; 29.21,63.754 C14.2
NetC15_1: C15.1 J6.A2 R18.1 U2.2 | length 82.2
  Top Layer w1.25: U2.2@47.244,76.459 U2.2
  Bottom Layer w1.25: J6.A2 7.493,75.639 R18.1 13.356,67.603 C15.1 18.221,65.98 11.43,72.771 11.43,79.153 13.684,81.407 42.821,81.407 46.433,77.795 46.433,77.514 47.244,76.703 U2.2
NetD1_1: D1.1 D2.2 | length 7
  Top Layer w1.25: D1.1 61.881,70.97 62.008,71.097 D2.2
NetD1_2: D1.2 Q1.1 R15.2 | length 122.2
  Top Layer w1.25: D1.2 58.646,60.094 61.209,57.531 64.643,57.531 67.437,54.737 67.437,47.849 68.169,47.117 Q1.1
  Bottom Layer w1.25: R15.2 43.658,20.491 38.444,20.491 35.313,23.622 12.954,23.622 12.37,30.607 28.016,46.253 38.481,46.253 52.322,60.094 D1.2
NetD2_1: D2.1 D3.2 | length 24.8
  Top Layer w1.25: D3.2 D3.2@42.002,52.361
  Bottom Layer w1.25: D3.2 51.28,61.773 60.551,61.773 D2.1
NetD3_1: D3.1 D4.2 U5.6 | length 29.4
  Top Layer w1.25: D3.1 41.935,40.043 U5.6
  Bottom Layer w1.25: D3.1 46.332,41.552 47.117,40.767 61.191,40.767 D4.2
NetD4_1: D4.1 D5.2 | length 6.4
  Top Layer w1.25: D5.2 57.213,53.888 63.436,53.888 D4.1
NetD5_1: D5.1 D6.2 | length 7.6
  Top Layer w1.25: D6.2 50.26,42.949 50.953,42.255 56.456,42.255 D5.1
NetD6_1: D6.1 Q2.1 R14.1 | length 79.7
  Top Layer w1.25: R14.1 39.125,12.245 37.338,14.032 37.276,14.032 36.195,15.113 36.195,39.855 D6.1
  Bottom Layer w1.25: D6.1 53.49,57.15 64.927,57.15 65.659,57.882 65.659,64.897 67.31,66.548 Q2.1
NetJ2_A1: J2.A1 R4.1 | length 11.7
  Bottom Layer w1.25: R4.1 9.139,5.9 J2.A1
NetJ3_A2: J3.A2 R13.1 | length 40.4
  Top Layer w1.25: R13.1 25.476,13.802 25.476,23.622 27.94,23.622 31.539,20.023 31.539,11.413 32.385,10.566 36.551,10.566 J3.A2
NetJ4_A1: J4.A1 R8.1 | length 53.8
  Bottom Layer w1.25: R8.1 17.662,9.496 18.394,8.763 63.002,8.763 J4.A1
NetJ4_A3: J4.A3 R11.2 | length 97.2
  Top Layer w1.25: v1(28.27,1.803) 13.335,16.739 13.335,24.486 14.021,25.171 29.966,25.171 R11.2 ; v1(69.758,1.803) J4.A3
  Bottom Layer w1.25: v1(28.27,1.803) v1(69.758,1.803)
NetJ7_A2: J7.A2 Q1.3 Q2.2 U5.2 | length 74.8
  Top Layer w1.25: Q2.2 71.999,64.008 77.089,58.918 77.089,47.36 71.766,42.037 Q1.3 71.755,35.687 72.967,34.475 J7.A2 J7.A2@73.025,28.892
  Bottom Layer w1.25: U5.2 48.578,23.241 67.374,23.241 J7.A2
NetR2_2: R2.2 R3.1 U3.2 | length 26.4
  Top Layer w1.25: R2.2 8.632,33.493 R3.1
  Bottom Layer w1.25: R3.1 15.596,27.647 16.319,26.924 24.613,26.924 25.248,27.559 25.248,27.915 U3.2
Pre_Amp_OP: C2.1 R4.2 | length 35.3
  Bottom Layer w1.25: R4.2 1.219,23.62 1.219,28.778 C2.1
Tone_Controller_OP: C6.1 U5.3 | length 32.1
  Top Layer w1.25: v1(65.532,25.273) 67.544,23.261 67.544,17.653 C6.1
  Bottom Layer w1.25: U5.3 49.085,25.273 v1(65.532,25.273)
pads on no net: U3.5 U3.6 U3.7 U4.5 U4.6 U4.7 U5.1 U5.5 U5.8

## Polygon pours and split planes (outlines as drawn)
GND on Bottom Layer "GND_L02_P001" (solid, pour order 1): 0.635,87.313 80.264,87.313 80.264,0.318 80.137,0.445 0.635,0.445

## Other copper
Bottom Layer:
  region net NetC15_1: 8.065,82.038 4.42,78.736 4.42,78.153 4.42,77.421 7.625,74.216 7.557,74.148 7.557,67.778 13.42,67.778 17.523,63.675 18.352,63.675 18.352,72.692 14.161,76.883 14.161,78.153 18.046,82.038

## Silkscreen, mask and mechanical layers (free items; w line width, h text height)
Top Overlay:
  drawing of 53 lines, arcs and shapes, not listed
  text "Team Resonance" at 77.47,34.925 h1.52 r270
Mechanical 1:
  lines w0.254: 102.87,46.482 102.997,46.482
Mechanical 13:
  the board outline again, w0.7

## Text inside footprints (layer, text, board x,y; h text height)
C1: Top Overlay "+" at 10.033,48.006 h1.5
C16: Top Overlay "+" at 26.62,75.967 h1.5
C17: Top Overlay "+" at 33.351,76.094 h1.5
J1: Top Overlay "A1" at 5.336,40.963 h1.5 r90
J2: Top Overlay "A1" at 9.027,5.392 h1.5 r90
J3: Top Overlay "A1" at 32.902,5.065 h1.5
J4: Top Overlay "A1" at 61.35,5.065 h1.5
J6: Top Overlay "A1" at 3.175,80.899 h1.5 r90
J7: Top Overlay "A1" at 73.662,20.262 h1.5 r90